# Altium PCB Incubator_HUZZAH32.PcbDoc
Units mm, origin at the board's own origin, x right, y up, seen from the top; angles counter-clockwise.
Board outline 140 x 28.1 mm, 2 copper layers (Top Layer, Bottom Layer); 24 components, 26 nets, 107 pads, 45 vias.
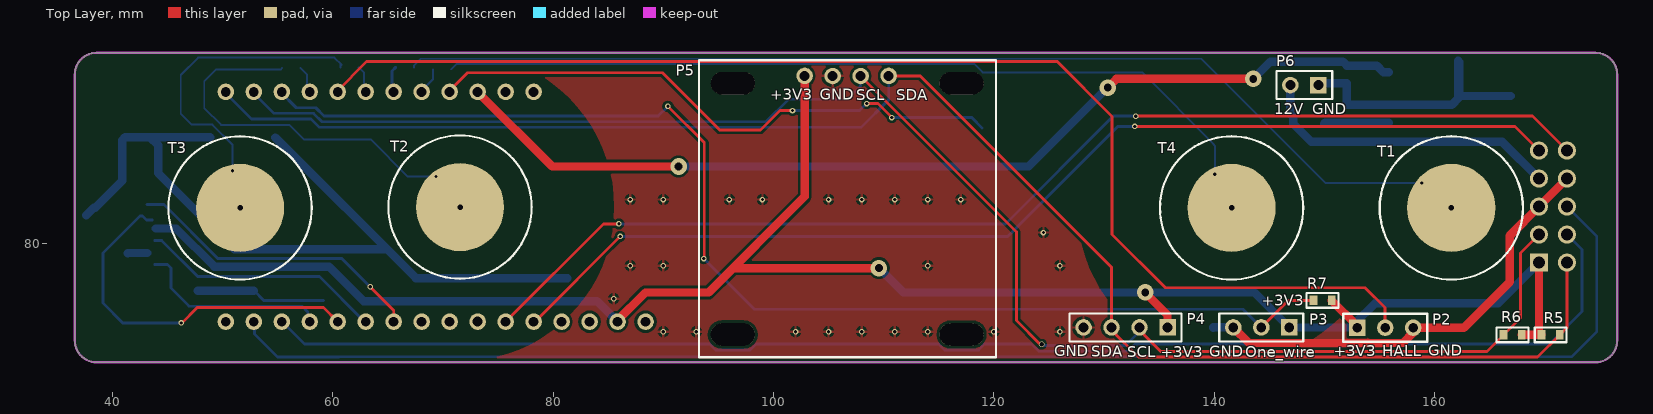
[diagram p0: Top Layer view]
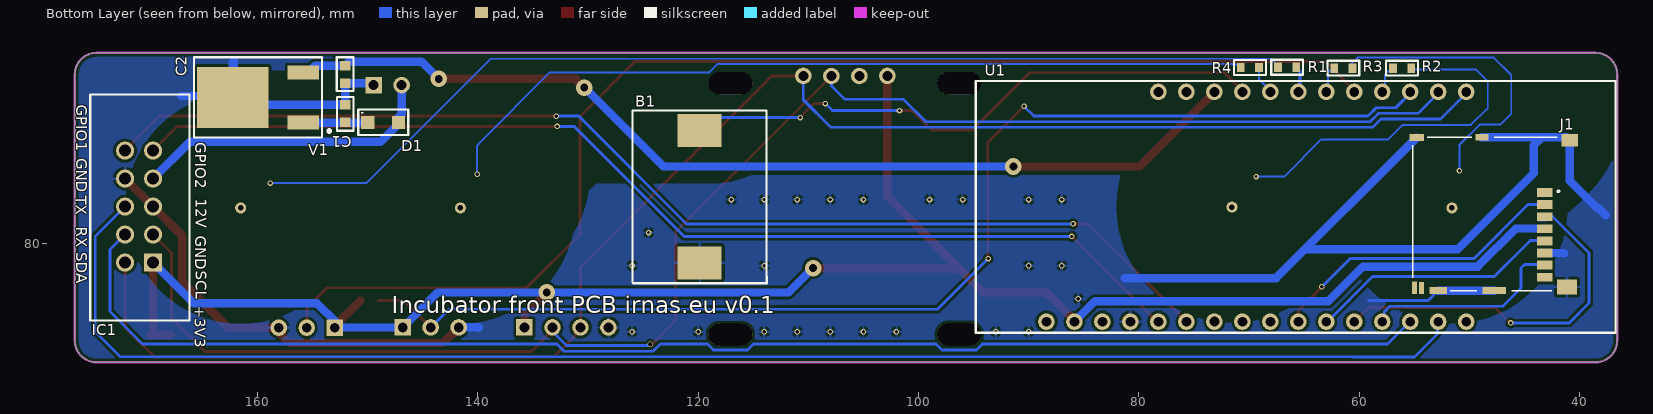
[diagram p1: Bottom Layer view, seen from below]

## Layer stack, top to bottom
Top Solder: solder mask 0.0102, Solder Resist, Dk 3.5
Top Layer: signal copper 0.0356
Dielectric 1: dielectric 0.32, FR-4, Dk 4.8
Bottom Layer: signal copper 0.0356
Bottom Solder: solder mask 0.0102, Solder Resist, Dk 3.5

## Board outline
38.582,69.221 cw(c38.582,71.221) 36.582,71.221 36.582,95.321 cw(c38.582,95.321) 38.582,97.321 174.582,97.321 cw(c174.582,95.321) 176.582,95.321 176.582,71.221 cw(c174.582,71.221) 174.582,69.221

## Design rules (kind name [scope] priority, off if disabled: settings)
Clearance Clearance_2 [InNamedPolygon('Bottom_layer_GND') vs InNetClass('Buttons')] p1: gap=10 ignorepadtopadclearanceinfootprint=FALSE
Clearance Clearance_1 [InNamedPolygon('Top Layer-GND') vs InNetClass('Buttons')] p2: gap=10 ignorepadtopadclearanceinfootprint=FALSE
Clearance [All] p3: gap=0.254 ignorepadtopadclearanceinfootprint=FALSE
HoleSize [All] p1: absolutevalues=TRUE maxlimit=5 minlimit=0.025 maxpercent=80.000 minpercent=20.000
MinimumAnnularRing [All] p1: minimumring=0.05
MinimumSolderMaskSliver [All] p1: minsoldermaskwidth=0.001
PlaneClearance [InNet('NetR1_1')] p1: clearance=0.762
PolygonConnect [All] p1: connectstyle=Relief reliefconductorwidth=0.254 reliefentries=4 polygonreliefangle="90 Angle" airgapwidth=0.254
RoutingVias RoutingVias_3 [InNet('GND')] p1: holewidth=0.711 width=1.27 viastyle="Through Hole" minholewidth=0.711 minwidth=1.27 maxholewidth=0.711 maxwidth=1.27
RoutingVias RoutingVias_2 [InNet('+5V')] p2: holewidth=0.711 width=1.27 viastyle="Through Hole" minholewidth=0.711 minwidth=1.27 maxholewidth=0.711 maxwidth=1.27
RoutingVias RoutingVias_1 [InNet('+3V3')] p3: holewidth=0.711 width=1.27 viastyle="Through Hole" minholewidth=0.711 minwidth=1.27 maxholewidth=0.711 maxwidth=1.27
RoutingVias [All] p4: holewidth=0.4 width=0.5 viastyle="Through Hole" minholewidth=0.3 minwidth=0.5 maxholewidth=0.3 maxwidth=0.5
SilkToSilkClearance [All] p1: silktosilkclearance=0.1
SilkToSolderMaskClearance [IsPad] p1: minsilkscreentomaskgap=0.1 clearancetoexposedcopper=TRUE
SolderMaskExpansion [All] p1: expansion=0.102
Width Width_2 [All] p1: maxlimit=0.762 minlimit=0.178 preferedwidth=0.254
Width Width_1 [InNet('+3V3')] p2: maxlimit=0.762 minlimit=0.254 preferedwidth=0.762
Width [InNetClass('Buttons')] p3: maxlimit=0.762 minlimit=0.178 preferedwidth=0.254
25 further rules are at their usual default settings.

## Classes and differential pairs
net class Buttons: Button1 Button2 Button3 Button4 NetR1_1 NetR2_1 NetR3_1 NetR4_1

## Components (designator, comment, footprint, x,y, rotation, side; value= is the part's Value field where it differs from the comment)
B1 "Buzzer" BUZZER 113.767,90.449 r270 bottom
C1 "0.33uF" CAP0603 152.019,91.796 r270 bottom
C2 "0.1uF" CAP0603 152.044,95.352 r90 bottom
D1 "Diode" SODFL350X110-2N 148.59,90.983 r180 bottom
IC1 "IDC10" IDC10 170.84,83.591 r90 bottom
J1 "Micro_SD" TE_2201778-1 47.93,82.677 r90 bottom
P2 "HALL_s" HDR1X3 152.984,72.365 r0 top
P3 "One_wire" HDR1X3 146.812,72.39 r180 top
P4 "I2C_connector" HDR1X4 135.763,72.39 r180 top
P5 "LCD_display" LCD_DISPLAY 93.218,96.647 r0 top
P6 "Power" HDR1X2 149.454,94.386 r180 top
R1 "510R" RES0603 67.996,95.326 r180 bottom
R2 "510R" RES0603 54.661,96.596 r0 bottom
R3 "510R" RES0603 59.995,96.596 r0 bottom
R4 "510R" RES0603 71.374,95.301 r180 bottom
R5 "4K7" RES0603 169.088,71.044 r0 top
R6 "4K7" RES0603 168.529,72.39 r180 top
R7 "4K7" RES0603 148.387,74.168 r0 top
T1 "Touch button" TOUCH_BUTTON 161.519,83.236 r90 top
T2 "Touch button" TOUCH_BUTTON 71.552,83.312 r90 top
T3 "Touch button" TOUCH_BUTTON 51.587,83.236 r90 top
T4 "Touch button" TOUCH_BUTTON 141.58,83.236 r90 top
U1 "ESP32" ESP32 94.742,71.907 r90 bottom
V1 "Voltage regulator" DPAK248P950X240-3N 162.23,93.269 r0 bottom

## Footprints (in the part's own frame and the unit in brackets; to place one, negate y for a bottom-side part, rotate by r counter-clockwise, add the part's x,y. Pads: shape width x height; smd on the part's side, far side on the other; paste and mask are expansions set on the pad)
BUZZER [mm]
  rect 3x4 smd: 1(0.2,-6.1) 2(12.2,-6.1)
  silkscreen extent -1.64,-12.19 14.05,-0.01, body extent -0.33,-12.22 12.73,-0.05, height 3
CAP0603 [mm] "Chip Capacitor, 2-Leads, Body 1.60x0.80mm, IPC Medium Density"
  rect 0.85x0.95 smd: 1(-0.8,0) 2(0.8,0)
  silkscreen extent -1.5,-0.76 1.56,0.75, body extent -0.8,-0.4 0.8,0.4, height 0.6
DPAK248P950X240-3N [mm] "D-PAK, 3-Pads, Body 6.25x6.76mm (max), IPC Medium Density"
  rect 2.85x1.25 smd: 1(-6.39,2.29) 3(-6.39,-2.27)
  rect 6.5x5.55 smd: 2(0,0)
  silkscreen extent -8.88,-3.65 3.54,3.64, body extent -4.4,-3.4 1.9,3.4, height 2.4
ESP32 [mm]
  round 1.5 hole 0.9: 1(1,-6.35) 2(1,-8.89) 3(1,-11.43) 4(1,-13.97) 5(1,-16.51) 6(1,-19.05) 7(1.01,-21.59) 8(1,-24.13) 9(1,-26.67) 10(1,-29.21) 11(1,-31.75) 12(1,-34.29) 13(1,-36.83) 14(1,-39.37) 15(1,-41.91) 16(1,-44.45) 17(21.86,-44.45) 18(21.86,-41.91) 19(21.86,-39.37) 20(21.86,-36.83) 21(21.86,-34.29) 22(21.86,-31.75) 23(21.86,-29.21) 24(21.86,-26.67) 25(21.86,-24.13) 26(21.86,-21.59) 27(21.86,-19.05) 28(21.86,-16.51)
  silkscreen extent 0,-57.99 22.85,0.06
HDR1X2 [mm] "Connector; Header; 2 Position"
  rect 1.5x1.5 hole 0.9: 1(0,0)
  round 1.5 hole 0.9: 2(2.54,0)
  silkscreen extent -1.27,-1.27 3.81,1.27
HDR1X3 [mm] "Connector; Header; 3 Position"
  rect 1.5x1.5 hole 0.9: 1(0,0)
  round 1.5 hole 0.9: 2(2.54,0) 3(5.08,0)
  silkscreen extent -1.27,-1.27 6.35,1.27
HDR1X4 [mm] "Connector; Header; 4 Position"
  rect 1.5x1.5 hole 0.9: 1(0,0)
  round 1.5 hole 0.9: 2(2.54,0) 3(5.08,0) 4(7.62,0)
  silkscreen extent -1.27,-1.27 8.89,1.27
IDC10 [mm]
  rect 1.65x1.65 / inner round 1.65 / far side rect 1.65x1.65 hole 1.1: 1(-5.313,-1.367)
  round 1.65 hole 1.1: 2(-5.313,1.173) 3(-2.773,-1.367) 4(-2.773,1.173) 5(-0.233,-1.367) 6(-0.233,1.173) 7(2.307,-1.367) 8(2.307,1.173) 9(4.847,-1.367) 10(4.847,1.173)
  silkscreen extent -10.56,-4.68 9.95,4.33, body extent -10.45,-4.51 9.91,4.66, height 9.43
LCD_DISPLAY [mm]
  round 1.5 hole 0.9: 1(9.61,-1.43)
  round 1.501 hole 0.9: 2(12.15,-1.44) 3(14.69,-1.44) 4(17.24,-1.43)
  oval 4x2 hole 2.032 slot 3.988 at 0 deg unplated: ""(3.09,-24.9) ""(3.1,-2.1) ""(23.85,-2.1)
  oval 4x2 hole 2 slot 3.988 at 0 deg unplated: ""(23.85,-24.9)
  silkscreen extent 0.01,-26.96 26.97,0
RES0603 [mm] "Chip Resistor, 2-Leads, Body 1.60x0.80mm, IPC Medium Density"
  rect 0.7x0.85 smd: 1(0.625,0.675) 2(2.275,0.675)
  silkscreen extent 0,0 2.9,1.35, body extent 0.65,0.28 2.25,1.07, height 0.6
SODFL350X110-2N [mm] "SODFL, 2-Leads, Body 1.90x3.50mm, IPC Medium Density"
  rect 1.2x1.2 smd: 1(-1.4,0) 2(1.4,0)
  silkscreen extent -2.26,-1.14 2.27,1.19, body extent -1.4,-0.95 1.4,0.95, height 1.1
TE_2201778-1 [mm]
  rect 0.8x1.4 smd: 1(1.965,-4.75) 2(0.865,-4.75) 3(-0.235,-4.75) 4(-1.335,-4.75) 5(-2.435,-4.75) 6(-3.535,-4.75) 7(-4.635,-4.75) 8(-5.735,-4.75)
  rect 1.15x0.45 smd: 9(-6.7,7.075)
  rect 1.1x0.45 smd: 10(-6.725,6.415)
  rect 1.35x1.8 smd: 11(-6.625,-6.8)
  rect 0.65x2.14 smd: 12(-6.95,-0.17)
  rect 0.65x1.6 smd: 13(-6.95,4.91)
  rect 0.65x1.3 smd: 14(6.95,6.85)
  rect 0.6x1.15 smd: 15(6.975,0.925)
  rect 1.16x1.5 smd: 16(6.695,-7.05)
  silkscreen extent -6.98,-6.11 6.98,7.2, body extent -7.02,-8.91 7.01,7.29, height 1.75
TOUCH_BUTTON [mm]
  round 8 smd: 1(0,0)
  round 1 hole 0.5: 1(0,0)
  silkscreen extent -6.5,-6.5 6.5,6.5

## Part data
B1: "MULTICOMP         MCABT-458-RC            SOUNDER, 75DB, 1-25V, SMD", Current Rating=1mA, Manufacturer=Multicomp, Manufacturer Part Number=MCABT-458-RC, Resonant Frequency=4kHz, Supply Voltage Max=25V, Supply Voltage Min=1V, ComponentLink1Description=http://www.farnell.com/datasheets/1860703.pdf, ComponentLink1URL=http://www.farnell.com/datasheets/1860703.pdf, Pricing 1="1=1.84, 3=1.67, 5=1.53, 10=1.44, 20=1.18, 50=1.16, 250=1.13 (EUR)", Product Range=-, Sound Level SPL=75dB, Stock 1=2929, Supplier 1=Farnell, SVHC="No SVHC (15-Jun-2015)", Tones=Single, Transducer Function=Sounder, Transducer Mounting=SMD
C1: "0.33µF ±10% 50V X7R Ceramic Capacitor -55°C ~ 125°C Surface Mount, MLCC 0603 (1608 Metric) 0.063\" L x 0.031\" W (1.60mm x 0.80mm)", Capacitance=0.33µF, Manufacturer=TDK, Manufacturer Part Number=C1608X7R1H334K080AC, Operating Temperature="-55°C ~ 125°C", Package / Case="0603 (1608 Metric)", PCN Part Number="MLCC Part Number Change 30/Nov/2012", Standard Package=1, Supplier Part Number 1=2522009, Temperature Coefficient=X7R, Tolerance=±10%, Voltage - Rated=50V, Applications="General Purpose", Catalog Drawings="C SERIES_0603_0.95", Category=Capacitors, ComponentLink1Description=https://datasheet.ciiva.com/24216/c1608x7r1h334k080ac-264671-24216479.pdf, ComponentLink1URL=https://datasheet.ciiva.com/24216/c1608x7r1h334k080ac-264671-24216479.pdf, ComponentLink2Description=https://datasheet.ciiva.com/22718/1796654-22718021.pdf, ComponentLink2URL=https://datasheet.ciiva.com/22718/1796654-22718021.pdf, ComponentLink3Description=https://datasheet.ciiva.com/6290/tdkmlcccaprange-6290791.pdf, ComponentLink3URL=https://datasheet.ciiva.com/6290/tdkmlcccaprange-6290791.pdf, ComponentLink4Description=https://datasheet.ciiva.com/16427/general-b11-16427753.pdf, ComponentLink4URL=https://datasheet.ciiva.com/16427/general-b11-16427753.pdf, ComponentLink5Description=https://datasheet.ciiva.com/23803/1735394-23803004.pdf, ComponentLink5URL=https://datasheet.ciiva.com/23803/1735394-23803004.pdf, ComponentLink6Description=https://datasheet.ciiva.com/28451/1796654-28451356.pdf, ComponentLink6URL=https://datasheet.ciiva.com/28451/1796654-28451356.pdf, ComponentLink7Description=https://datasheet.ciiva.com/6290/tdkmlcccaprange-6290782.pdf, ComponentLink7URL=https://datasheet.ciiva.com/6290/tdkmlcccaprange-6290782.pdf, Design Resources="20 W Non-Isolated Buck LED Driver Using PL LNK460KG", EDA / CAD Models="Download from Accelerated Designs", Family="Ceramic Capacitors", Mounting Type="Surface Mount, MLCC", Online Catalog="C Series, General Purpose", Other Names=445-5950-6, Packaging=Digi-Reel®, Pricing 1="4000=0.0692 (EUR)", Product Training Modules="C Series General Applications SEAT, CCV, and TVCL Design Tools Guide to Replacing an Electrolytic Capacitor with an MLCC", RoHS Information="RoHS Certificate-MLCC", Series=C, Size / Dimension="0.063\" L x 0.031\" W (1.60mm x 0.80mm)", Stock 1=268000, Supplier 1=Farnell, Thickness (Max)="0.037\" (0.95mm)"
C2: "CAP CER 0.1UF 50V X7R 0603", Capacitance="0.1 uF", Capacitance - nF="100 nF", Capacitance - pF="100000 pF", Case Code - in=0603, Case Code - mm=1608, Case Height="0.035 mm", Case Length="1.6 mm", Case Width="0.81 mm", Dielectric=X7R, Manufacturer="Kyocera AVX", Manufacturer Part Number=06035C104K4Z2A, Maximum Operating Temperature="+ 125 C", Minimum Operating Temperature="- 55 C", Operating Temperature Range="- 55 C to + 125 C", Package / Case="0603 (1608 metric)", Supplier Part Number 1=1833843RL, Temperature Coefficient / Code="+/- 15 %", Tolerance="10 %", Voltage Rating="50 V", Brand=AVX, ComponentLink1Description=https://datasheet.ciiva.com/17495/flexiterm-17495077.pdf, ComponentLink1URL=https://datasheet.ciiva.com/17495/flexiterm-17495077.pdf, ComponentLink2Description=https://datasheet.ciiva.com/153/flexiterm-153369.pdf, ComponentLink2URL=https://datasheet.ciiva.com/153/flexiterm-153369.pdf, ComponentLink3Description=https://datasheet.ciiva.com/153/flexiterm-153370.pdf, ComponentLink3URL=https://datasheet.ciiva.com/153/flexiterm-153370.pdf, ComponentLink4Description=https://datasheet.ciiva.com/15212/getdatasheetpartid-494917-15212298.pdf, ComponentLink4URL=https://datasheet.ciiva.com/15212/getdatasheetpartid-494917-15212298.pdf, ComponentLink5Description=https://datasheet.ciiva.com/153/flexiterm-153371.pdf, ComponentLink5URL=https://datasheet.ciiva.com/153/flexiterm-153371.pdf, ComponentLink6Description=https://datasheet.ciiva.com/22707/1679506-22707787.pdf, ComponentLink6URL=https://datasheet.ciiva.com/22707/1679506-22707787.pdf, ComponentLink7Description=https://datasheet.ciiva.com/1457/1679506-1457868.pdf, ComponentLink7URL=https://datasheet.ciiva.com/1457/1679506-1457868.pdf, Dimensions="0.81 mm W x 1.6 mm L x 0.035 mm H", Dissipation Factor DF=2.5, Factory Pack Quantity=4000, Packaging=Reel, Product="Automotive MLCCs", Product Category="Multilayer Ceramic Capacitors MLCC - SMD/SMT", RoHS=Details, Series="0603 C", Stock 1=0, Supplier 1=Farnell, Termination="Flexible (Soft)", Termination Style=SMD/SMT, Tradename=FLEXITERM, Type="Automotive MLCCs X7R Dielectric, Flexiterm", Voltage Rating DC="50 V"
D1: library part "20V,1A, SOD-123", "NXP         PMEG2010ER             Schottky Rectifier, Single, 20 V, 1 A, SOD-123W, 2 Pins, 340 mV", Manufacturer="NXP Semiconductors", Manufacturer Part Number=PMEG2010ER, Maximum Continuous Forward Current=1A, Maximum Operating Temperature="+150 °C", Minimum Operating Temperature="-55 °C", Package Type=SOD-123, Peak Forward Voltage=340mV, Peak Reverse Current=1mA, Peak Reverse Repetitive Voltage=20V, Supplier Part Number 1=1907681, ComponentLink1Description=https://datasheet.ciiva.com/5727/1760771-5727088.pdf, ComponentLink1URL=https://datasheet.ciiva.com/5727/1760771-5727088.pdf, ComponentLink2Description=https://datasheet.ciiva.com/22696/1383341-22696483.pdf, ComponentLink2URL=https://datasheet.ciiva.com/22696/1383341-22696483.pdf, ComponentLink3Description=https://datasheet.ciiva.com/7965/1383341-7965062.pdf, ComponentLink3URL=https://datasheet.ciiva.com/7965/1383341-7965062.pdf, Dimensions="2.8 x 1.9 x 1.1mm", Diode Configuration=Single, Diode Type=Schottky, Height=1.1mm, Length=2.8mm, Mounting Type="Surface Mount", Number of Elements per Chip=1, Pin Count=2, Pricing 1="5=0.314, 25=0.196, 100=0.147, 250=0.141, 500=0.0849, 1000=0.075, 5000=0.0735 (EUR)", Stock 1=5091, Supplier 1=Farnell, Width=1.9mm
IC1: "BOX HEADER 2.54MM MALE STR 10POS", Current Rating="3 A", Flammability Rating="UL 94 V-0", Insulation Resistance="1000 MOhms", Manufacturer="Wurth Electronics", Manufacturer Part Number=61201021621, Operating Temperature Range="- 40 C to + 125 C", Supplier Part Number 1=1642019, Voltage Rating="250 V", Application=Wire-to-Board, Brand="Wurth Electronics", ComponentLink1Description=https://datasheet.ciiva.com/731/6120xx21621-731344.pdf, ComponentLink1URL=https://datasheet.ciiva.com/731/6120xx21621-731344.pdf, ComponentLink2Description=https://datasheet.ciiva.com/15395/6120xx21621-265834-15395106.pdf, ComponentLink2URL=https://datasheet.ciiva.com/15395/6120xx21621-265834-15395106.pdf, ComponentLink3Description=https://datasheet.ciiva.com/7648/76595-7648121.pdf, ComponentLink3URL=https://datasheet.ciiva.com/7648/76595-7648121.pdf, Contact Gender="Pin (Male)", Contact Material="Copper Alloy", Contact Plating=Gold, Housing Material="Polybutylene Terephthalate (PBT)", Mounting Angle=Horizontal, Mounting Style="Through Hole", Number of Positions="10 Position", Number of Rows="2 Row", Packaging=Tray, Pitch="2.54 mm", Product=Headers, Product Category="Headers & Wire Housings", RoHS=True, Series=WR-BHD, Stock 1=0, Supplier 1=Farnell, Termination Style=Solder, Type=Shrouded
J1: library part 2201778-1, "MICRO SD PUSH PUSH LOW PROFILE TYPE", Package=None, Availability=Good, Centerline_Pitch="1.1 mm[.04 in]", EU_RoHS_Compliance=Compliant, Link=http://www.te.com/usa-en/product-2201778-1.html, MF="TE Connectivity", MP=2201778-1, Number_of_Positions=8, Price="1.95 USD", Product_Type="Removable Memory Products", SnapEDA_Link=https://www.snapeda.com/parts/2201778-1/TE%20Connectivity%20AMP%20Connectors/view-part/?ref=snap
P2 P3: library part "Header 3", "Header, 3-Pin", LatestRevisionDate=17-Jul-2002, LatestRevisionNote="Re-released for DXP Platform.", Publisher="Altium Limited"
P4 P5: library part "Header 4", "Header, 4-Pin", LatestRevisionDate=17-Jul-2002, LatestRevisionNote="Re-released for DXP Platform.", Publisher="Altium Limited"
P6: library part "Header 2", "Header, 2-Pin", LatestRevisionDate=17-Jul-2002, LatestRevisionNote="Re-released for DXP Platform.", Publisher="Altium Limited"
R1 R2 R3 R4: "Res Thick Film 0603 510 Ohm 1% 0.1W(1/10W) ±100ppm/C Molded SMD Automotive Punched T/R", Manufacturer=Panasonic, Manufacturer Part Number=ERJ-3EKF5100V, Power Rating=100mW, Resistance=510ohm, Resistance Tolerance="± 1%", Resistor Case Style="0603 ^1608 Metric]", Resistor Element Type="Thick Film", Supplier Part Number 1=2059312, Temperature Coefficient="± 100ppm/°C", Voltage Rating=75V, ComponentLink1Description=https://datasheet.ciiva.com/9181/aoa0000ce2-9181526.pdf, ComponentLink1URL=https://datasheet.ciiva.com/9181/aoa0000ce2-9181526.pdf, ComponentLink2Description=https://datasheet.ciiva.com/28565/1678782-28565126.pdf, ComponentLink2URL=https://datasheet.ciiva.com/28565/1678782-28565126.pdf, ComponentLink3Description=https://datasheet.ciiva.com/16787/70260748-16787975.pdf, ComponentLink3URL=https://datasheet.ciiva.com/16787/70260748-16787975.pdf, ComponentLink4Description=https://datasheet.ciiva.com/46436/426256-46436792.pdf, ComponentLink4URL=https://datasheet.ciiva.com/46436/426256-46436792.pdf, ComponentLink5Description=https://datasheet.ciiva.com/24027/aoa0000ce2-24027562.pdf, ComponentLink5URL=https://datasheet.ciiva.com/24027/aoa0000ce2-24027562.pdf, ComponentLink6Description=https://datasheet.ciiva.com/28676/1678782-28676970.pdf, ComponentLink6URL=https://datasheet.ciiva.com/28676/1678782-28676970.pdf, ComponentLink7Description=https://datasheet.ciiva.com/16514/aoa0000ce2-16514091.pdf, ComponentLink7URL=https://datasheet.ciiva.com/16514/aoa0000ce2-16514091.pdf, ComponentLink8Description=https://datasheet.ciiva.com/5868/426256-5868140.pdf, ComponentLink8URL=https://datasheet.ciiva.com/5868/426256-5868140.pdf, ComponentLink9Description=https://datasheet.ciiva.com/9181/aoa0000ce2-9181437.pdf, ComponentLink9URL=https://datasheet.ciiva.com/9181/aoa0000ce2-9181437.pdf, ComponentLink10Description=https://datasheet.ciiva.com/16775/70260748-16775519.pdf, ComponentLink10URL=https://datasheet.ciiva.com/16775/70260748-16775519.pdf, ComponentLink11Description=https://datasheet.ciiva.com/30146/aoa0000ce2-30146815.pdf, ComponentLink11URL=https://datasheet.ciiva.com/30146/aoa0000ce2-30146815.pdf, Packaging="Full Reel", Pricing 1="10=0.0416, 100=0.0243, 500=0.0183, 1000=0.0164 (EUR)", Product Range="PANASONIC - ERJ Series Thick Film Chip Resistors", Stock 1=28364, Supplier 1=Farnell, SVHC="To Be Advised"
R5 R6 R7: "Res Thick Film 0603 4.7K Ohm 1% 0.1W(1/10W) ±100ppm/C Molded SMD Automotive T/R", Case Code - in=0603, Case Code - mm=1608, Manufacturer=Panasonic, Manufacturer Part Number=ERJ-3EKF4701V, Operating Temperature Range="- 55 C to + 155 C", Package / Case="0603 (1608 metric)", Power Rating="100 mW", Resistance="4.7 kOhms", Supplier Part Number 1=2397726, Temperature Coefficient="100 PPM / C", Tolerance="1 %", Voltage Rating="75 V", Brand=Panasonic, ComponentLink1Description=https://datasheet.ciiva.com/16449/aoa0000ce2-16449479.pdf, ComponentLink1URL=https://datasheet.ciiva.com/16449/aoa0000ce2-16449479.pdf, ComponentLink2Description=https://datasheet.ciiva.com/16511/aoa0000ce2-16511783.pdf, ComponentLink2URL=https://datasheet.ciiva.com/16511/aoa0000ce2-16511783.pdf, ComponentLink3Description=https://datasheet.ciiva.com/7830/426256-7830985.pdf, ComponentLink3URL=https://datasheet.ciiva.com/7830/426256-7830985.pdf, ComponentLink4Description=https://datasheet.ciiva.com/9195/aoa0000ce2-9195740.pdf, ComponentLink4URL=https://datasheet.ciiva.com/9195/aoa0000ce2-9195740.pdf, ComponentLink5Description=https://datasheet.ciiva.com/46372/1678782-46372716.pdf, ComponentLink5URL=https://datasheet.ciiva.com/46372/1678782-46372716.pdf, ComponentLink6Description=https://datasheet.ciiva.com/16758/70260748-16758189.pdf, ComponentLink6URL=https://datasheet.ciiva.com/16758/70260748-16758189.pdf, ComponentLink7Description=https://datasheet.ciiva.com/24160/aoa0000ce2-24160445.pdf, ComponentLink7URL=https://datasheet.ciiva.com/24160/aoa0000ce2-24160445.pdf, ComponentLink8Description=https://datasheet.ciiva.com/46372/1678782-46372717.pdf, ComponentLink8URL=https://datasheet.ciiva.com/46372/1678782-46372717.pdf, ComponentLink9Description=https://datasheet.ciiva.com/17213/aoa0000ce2-17213182.pdf, ComponentLink9URL=https://datasheet.ciiva.com/17213/aoa0000ce2-17213182.pdf, ComponentLink10Description=https://datasheet.ciiva.com/7830/aoa0000ce2-7830735.pdf, ComponentLink10URL=https://datasheet.ciiva.com/7830/aoa0000ce2-7830735.pdf, Factory Pack Quantity=5000, Height="0.45 mm", Length="1.6 mm", Packaging=Reel, Pricing 1="5000=0.0123, 25000=0.0099 (EUR)", Product="Thick Film Resistors SMD", Product Category="Thick Film Resistors", Qualification=AEC-Q200, RoHS=True, Series=ERJ, Stock 1=240000, Supplier 1=Farnell, Termination Style=SMD/SMT, Type="Precision Thick Film Resistors SMD", Unit Weight="0.000071 oz", Width="0.8 mm"
U1: library part 3405, "Dip connectro for MCU", Manufacturer="Adafruit Industries", Supplier Part Number 1=1528-2181-ND, ComponentLink1Description=https://espressif.com/sites/default/files/documentation/esp32_datasheet_en.pdf, ComponentLink1URL=https://espressif.com/sites/default/files/documentation/esp32_datasheet_en.pdf, Manufacturer Part Number=3405, Pricing 1="1=19.95 (USD)", Stock 1=276, Supplier 1=Digi-Key
V1: library part 5-20V, "FAIRCHILD SEMICONDUCTOR         KA7805ERTF             Linear Voltage Regulator, 7805, Fixed, 10V To 35V In, 5V And 1A Out, TO-252-3", Dropout Voltage Measurement Current="1 A", Manufacturer="ON Semiconductor / Fairchild", Manufacturer Part Number=KA7805ERTF, Maximum Input Voltage="25 V", Maximum Operating Temperature="+125 °C", Maximum Output Current=1A, Minimum Input Voltage="7 V", Minimum Operating Temperature="0 °C", Output Voltage="5 V", Package Type=DPAK, Quiescent Current=8mA, Supplier Part Number 1=2102585RL, Typical Dropout Voltage @ Current="2 V @ 1 A", ComponentLink1Description=https://datasheet.ciiva.com/26180/ka7824e-26180282.pdf, ComponentLink1URL=https://datasheet.ciiva.com/26180/ka7824e-26180282.pdf, ComponentLink2Description=https://datasheet.ciiva.com/1511/1747520-1511515.pdf, ComponentLink2URL=https://datasheet.ciiva.com/1511/1747520-1511515.pdf, ComponentLink3Description=https://datasheet.ciiva.com/3224/ka7824e-3224876.pdf, ComponentLink3URL=https://datasheet.ciiva.com/3224/ka7824e-3224876.pdf, ComponentLink4Description=https://datasheet.ciiva.com/7658/1747520-7658876.pdf, ComponentLink4URL=https://datasheet.ciiva.com/7658/1747520-7658876.pdf, ComponentLink5Description=https://datasheet.ciiva.com/6592/ka7805e-6592445.pdf, ComponentLink5URL=https://datasheet.ciiva.com/6592/ka7805e-6592445.pdf, ComponentLink6Description=https://datasheet.ciiva.com/6592/ka7805e-6592446.pdf, ComponentLink6URL=https://datasheet.ciiva.com/6592/ka7805e-6592446.pdf, ComponentLink7Description=https://datasheet.ciiva.com/6592/ka7805e-6592463.pdf, ComponentLink7URL=https://datasheet.ciiva.com/6592/ka7805e-6592463.pdf, ComponentLink8Description=https://datasheet.ciiva.com/48694/001252964-da-01-en-ic-reg-ldo-5v-1a-ka7805ertf-to-252-3-fsc-48694758.pdf, ComponentLink8URL=https://datasheet.ciiva.com/48694/001252964-da-01-en-ic-reg-ldo-5v-1a-ka7805ertf-to-252-3-fsc-48694758.pdf, Dimensions="6.73 x 6.22 x 2.38mm", Height=2.38mm, Length=6.73mm, Line Regulation="100 mV", Load Regulation="100 mV", Mounting Type="Surface Mount", Number of Outputs=1, Output Type=Fixed, Pin Count=3, Polarity=Positive, Regulator Function=Linear, Series=KA78xx, Stock 1=0, Supplier 1=Farnell, Width=6.22mm

## Via types
v1: diameter 0.5, hole 0.3, Top Layer to Bottom Layer, 39 vias
v2: diameter 1.5, hole 0.7, Top Layer to Bottom Layer, 5 vias
v3: diameter 0.5, hole 0.4, Top Layer to Bottom Layer, 1 vias

## Nets (pads, with @x,y where several pads share a name; then routed paths per layer and width w, separated by ;. In a path a pad name is that pad's centre, name@x,y a point inside that pad or via, vN(x,y) a via of type N, cw(c..) or ccw(c..) an arc to the next point about the centre after c; other vN are vias at no path point)
12V: D1.2 IC1.7 P6.2 | length 27.8
  Bottom Layer w0.762: P6.2@146.914,94.234 146.914,91.77 147.165,91.519 147.165,90.881 148.816,89.23 166.142,89.23 IC1.7
+3V3: IC1.1 J1.4 P2.1 P3.1 P4.1 P5.1 R5.1 R6.1 R7.2 U1.2 | length 172
  Top Layer w0.75: v2(133.731,75.565) 135.763,73.533 P4.1 ; R7.2 152.984,72.521 P2.1 ; R6.1 169.709,71.715 R5.1 169.473,71.958 IC1.1
  Top Layer w0.762: U1.2@85.725,72.907 88.383,75.565 94.123,75.565 102.828,84.27 P5.1 ; 96.482,77.813 96.52,77.775 v2(109.576,77.775)
  Bottom Layer w0.75: 43.942,81.367 45.785,81.367 49.251,77.902 59.665,77.902 62.789,74.778 83.982,74.778 U1.2 ; v2(109.576,77.775) 111.785,75.565 v2(133.731,75.565) 143.637,75.565 P3.1 152.781,72.39 152.781,72.771 154.584,74.574 165.769,74.574 IC1.1
+5V: C2.2 U1.26 V1.3 | length 89.8
  Top Layer w0.762: U1.26 79.924,86.995 v2(91.389,86.995) ; v2(130.327,94.158) 131.115,94.945 v2(143.535,94.945)
  Bottom Layer w0.762: v2(91.389,86.995) 123.165,86.995 v2(130.327,94.158) ; v2(143.535,94.945) 145.11,96.52 151.676,96.52 C2.2 154.75,96.152 155.362,95.539 V1.3
Button1: R1.2 U1.23 | length 2.4
  Bottom Layer w0.254: U1.23@65.405,93.767 65.391,93.782 65.391,95.671 R1.2
Button2: R2.2 U1.20 | length 2.5
  Bottom Layer w0.178: R2.2@57.063,95.947 57.647,95.362 57.647,93.905 U1.20@57.785,93.767
Button3: R3.2 U1.22 | length 2.4
  Bottom Layer w0.178: R3.2@62.346,95.997 62.854,95.489 62.854,93.778 U1.22@62.865,93.767
Button4: R4.2 U1.24 | length 2.5
  Bottom Layer w0.178: U1.24@67.945,93.767 69.099,94.921 R4.2@69.099,95.823
CD/DAT3: J1.2 U1.10 | length 27.4
  Top Layer w0.254: v1(63.398,76.073) 65.532,73.939 U1.10
  Bottom Layer w0.254: J1.2@43.154,83.542 44.68,83.542 49.564,78.658 60.814,78.658 v1(63.398,76.073)
CMD: J1.3 U1.12 | length 33.7
  Top Layer w0.254: v1(46.253,72.796) 46.304,72.796 47.701,74.193 59.166,74.193 U1.12
  Bottom Layer w0.254: J1.3@43.623,82.148 43.084,82.148 42.733,82.499 42.494,82.499 39.141,79.146 39.141,74.6 40.945,72.796 v1(46.253,72.796)
DAT0: J1.7 U1.13 | length 17.5
  Bottom Layer w0.254: J1.7@43.84,78.093 45.008,78.093 45.314,77.787 45.314,75.971 46.965,74.32 57.201,74.32 57.734,73.787 U1.13@57.734,72.984
GND: B1.2 C1.1 C2.1 IC1.5 IC1.8 J1.6 J1.11 J1.12 J1.13 J1.14 J1.15 J1.16 P2.3 P3.3 P4.4 P5.2 P6.1 U1.4 V1.2 | length 157.1
  Top Layer w0.762: P3.3 143.15,70.972 157.124,70.972 158.064,71.912 P2.3 162.662,72.365 166.827,76.53 166.827,80.712 IC1.5 IC1.8
  Bottom Layer w0.254: J1.13 53.738,74.828 59.157,74.828
  Bottom Layer w0.762: 37.643,82.575 38.329,83.261 38.456,83.261 40.88,85.685 J1.16 41.16,89.652 43.434,89.652 ; 41.402,79.121 41.423,79.142 J1.6 ; J1.12 J1.13 ; J1.15@48.88,89.627 J1.15 43.434,89.652 ; J1.14 67.546,76.86 81.305,76.86 ; 64.905,79.502 51.054,79.502 44.145,86.411 44.145,88.941 43.434,89.652 ; 139.903,72.365 139.929,72.39 P3.3 ; P6.1@149.454,94.234 149.771,94.552 C2.1 152.044,92.672 C1.1@152.095,92.621 ; C1.1 161.557,92.596 V1.2 ; 166.903,93.396 162.357,93.396 V1.2 ; 162.154,96.561 162.154,93.345 V1.2 ; 162.154,96.561 162.154,96.586 162.128,96.586 162.154,96.561 ; 162.154,96.561 162.23,96.485 V1.2
  other v1: 90,72 93,72 102,72 105,72 108,72 111,72 114,72 120,72 126,72 85.5,75 87,78 90,78 114,78 126,78 124.5,81 87,84 90,84 96,84 99,84 105,84 108,84 111,84 114,84 117,84
GPIO1: IC1.10 U1.6 | length 105.3
  Top Layer w0.254: U1.6 84.573,81.788 v1(85.979,81.788) ; v1(132.867,91.567) 168.885,91.567 IC1.10
  Bottom Layer w0.254: v1(85.979,81.788) 121.056,81.788 130.835,91.567 v1(132.867,91.567)
GPIO2: IC1.9 U1.5 | length 99.5
  Top Layer w0.254: U1.5 78.343,72.907 v1(86.081,80.645) ; v1(132.791,90.627) 167.285,90.627 IC1.9
  Bottom Layer w0.254: v1(86.081,80.645) 121.26,80.645 131.242,90.627 v1(132.791,90.627)
HALL: P2.2 U1.21 | length 113.4
  Top Layer w0.254: U1.21@60.325,93.767 63.078,96.52 125.755,96.52 130.734,91.542 130.734,80.823 135.564,75.993 153.699,75.993 155.499,74.193 P2.2@155.499,72.644
NetB1_1: B1.1 U1.25 | length 53.2
  Top Layer w0.254: U1.25@70.485,93.767 72.222,95.504 89.916,95.504 95.123,90.297 98.806,90.297 100.584,92.075 v1(101.727,92.075) ; v1(108.458,92.71) 109.474,92.71 v1(110.744,91.44)
  Bottom Layer w0.254: v1(101.727,92.075) 107.823,92.075 v1(108.458,92.71) ; v1(110.744,91.44) 117.99,91.44 B1.1@118.927,90.503
NetC1_2: C1.2 D1.1 V1.1 | length 5.9
  Bottom Layer w0.762: D1.1@149.965,90.881 150.062,90.979 V1.1
NetR1_1: R1.1 T1.1 | length 96.5
  Bottom Layer w0.178: R1.1 67.371,96.154 67.991,96.774 138.836,96.774 150.114,85.496 v1(158.826,85.496)
NetR2_1: R2.1 T2.1 | length 33.6
  Bottom Layer w0.178: R2.1@55.413,95.947 55.26,95.794 49.388,95.794 48.336,94.742 48.336,92.304 49.86,90.78 56.058,90.78 57.379,89.459 63.449,89.459 66.827,86.081 v1(69.367,86.081)
NetR3_1: R3.1 T3.1 | length 27.7
  Bottom Layer w0.178: v1(50.902,86.614) 50.902,88.976 49.073,90.805 47.193,90.805 46.203,91.796 46.203,95.301 47.78,96.878 60.145,96.878 60.796,96.228 60.696,96.328 R3.1@60.696,95.997
NetR4_1: R4.1 T4.1 | length 75.2
  Bottom Layer w0.178: R4.1@70.749,95.823 71.235,96.31 103.281,96.31 103.29,96.3 108.361,96.3 108.371,96.31 118.204,96.31 118.985,95.529 133.452,95.529 139.979,89.002 139.954,88.976 140.056,88.875 v1(140.056,86.284)
One_wire: P3.2 R7.1 U1.19 | length 110.6
  Top Layer w0.254: v1(90.424,92.456) 93.726,89.154 v1@93.726,78.638 ; P3.2 146.725,74.843 R7.1
  Bottom Layer w0.254: U1.19@55.245,93.767 56.683,92.329 58.46,92.329 59.222,91.567 89.535,91.567 v1(90.424,92.456) ; v1(93.675,78.638) 98.273,74.041 142.621,74.041 P3.2
RX: IC1.4 U1.14 | length 129
  Bottom Layer w0.254: U1.14@55.448,72.882 57.439,70.891 94.21,70.891 94.751,70.35 97.865,70.35 98.406,70.891 114.97,70.891 115.511,70.35 118.625,70.35 119.166,70.891 123.415,70.891 124.072,70.235 124.594,70.235 124.598,70.231 132.163,70.231 132.824,70.891 170.434,70.891 173.38,73.838 173.38,79.451 IC1.4
SCK: J1.5 U1.11 | length 22
  Bottom Layer w0.254: J1.5@43.84,80.293 44.472,80.293 47.752,77.013 58.785,77.013 U1.11@62.814,72.984
SCL: IC1.3 P4.2 P5.3 R6.2 U1.18 | length 144.8
  Top Layer w0.254: P5.3 122.047,81.068 122.047,73.025 124.206,70.866 v3(124.333,70.866) ; P4.2 133.223,72.136 135.149,70.21 164.749,70.21 R6.2 167.792,73.253 167.792,79.137 IC1.3
  Bottom Layer w0.178: P4.2@133.223,72.009 P4.2
  Bottom Layer w0.254: U1.18@52.705,93.767 54.651,91.821 58.249,91.821 59.011,91.059 99.327,91.059 101.359,93.091 106.68,93.091 107.908,94.319 P5.3 ; v3(124.333,70.866) 124.456,70.743 124.805,70.743 124.809,70.739 131.953,70.739 P4.2@133.223,72.009
SDA: IC1.2 P4.3 P5.4 R5.2 U1.17 | length 147.3
  Top Layer w0.254: P5.4 113.317,95.217 130.683,77.851 P4.3 130.683,72.136 133.117,69.702 169.346,69.702 R5.2 172.013,72.369 IC1.2
  Bottom Layer w0.254: U1.17@50.165,93.767 52.619,91.313 58.039,91.313 58.801,90.551 107.95,90.551 110.458,93.059 P5.4
TX: IC1.6 U1.15 | length 137.3
  Bottom Layer w0.254: U1.15@52.908,72.882 52.908,71.785 54.991,69.702 60.452,69.702 ; 60.579,69.702 60.452,69.702 ; IC1.6 174.727,80.645 174.727,72.034 172.415,69.723 60.473,69.723 60.452,69.702
pads on no net: J1.1 J1.8 J1.9 J1.10 P5. U1.1 U1.3 U1.7 U1.8 U1.9 U1.16 U1.27 U1.28

## Polygon pours and split planes (outlines as drawn)
GND on Top Layer "Top Layer-GND" (solid, remove dead copper, pour order 7): 38.582,69.221 cw(c38.582,71.221) 36.582,71.221 36.582,95.321 cw(c38.582,95.321) 38.582,97.321 174.582,97.321 cw(c174.582,95.321) 176.582,95.321 176.582,71.221 cw(c174.582,71.221) 174.582,69.221
GND on Bottom Layer "Bottom_layer_GND" (solid, remove dead copper, pour order 8): 38.582,69.221 cw(c38.582,71.221) 36.582,71.221 36.582,95.321 cw(c38.582,95.321) 38.582,97.321 174.582,97.321 cw(c174.582,95.321) 176.582,95.321 176.582,71.221 cw(c174.582,71.221) 174.582,69.221

## Keep-outs
Keep-Out Layer:
  lines w0.2: 36.582,71.221 ccw(c38.582,71.221) 38.582,69.221 174.582,69.221 ccw(c174.582,71.221) 176.582,71.221 ; 36.582,71.221 36.582,95.321 ; 36.582,71.221 36.582,71.221 ; 36.582,95.321 cw(c38.582,95.321) 38.582,97.321 174.582,97.321 cw(c174.582,95.321) 176.582,95.321 ; 36.582,95.321 36.582,95.321 ; 176.582,71.221 176.582,71.221 ; 176.582,71.221 176.582,95.321 ; 176.582,95.321 176.582,95.321

## Silkscreen, mask and mechanical layers (free items; w line width, h text height)
Top Overlay:
  text "+3V3" at 99.72,93.04 h1
  text "GND" at 104.191,93.04 h1
  text "SCL" at 107.493,93.015 h1
  text "SDA" at 111.15,93.015 h1
  text "12V" at 145.466,91.745 h1
  text "GND" at 148.895,91.745 h1
  text "+3V3" at 144.297,74.371 h1
  text "GND" at 159.436,69.799 h1
  text "GND" at 125.501,69.774 h1
  text "+3V3" at 150.851,69.774 h1
  text "HALL" at 155.245,69.774 h1
  text "SDA" at 128.854,69.748 h1
  text "GND" at 139.548,69.723 h1
  text "SCL" at 132.131,69.698 h1
  text "+3V3" at 135.153,69.698 h1
  text "One_wire" at 142.799,69.672 h1
Bottom Overlay:
  text "GPIO1" at 176.428,92.608 h1 r90
  text "GPIO2" at 165.633,89.205 h1 r90
  text "GND" at 176.428,87.732 h1 r90
  text "TX" at 176.505,84.328 h1 r90
  text "12V" at 165.583,84.049 h1 r90
  text "RX" at 176.428,81.534 h1 r90
  text "GND" at 165.633,80.696 h1 r90
  text "SDA" at 176.428,79.197 h1 r90
  text "SCL" at 165.608,77.521 h1 r90
  text "+3V3" at 165.684,74.346 h1 r90
  text "Incubator front PCB irnas.eu v0.1" at 147.828,73.66 h1.53
Mechanical 1:
  circle w0.013: c141.582,83.271 r1.25
  circle w0.013: c161.582,83.271 r1.25
  circle w0.013: c51.582,83.271 r1.25
  circle w0.013: c71.582,83.271 r1.25
  lines w0.013: 36.582,71.221 ccw(c38.582,71.221) 38.582,69.221 174.582,69.221 ccw(c174.582,71.221) 176.582,71.221 176.582,95.321 ccw(c174.582,95.321) 174.582,97.321 38.582,97.321 ccw(c38.582,95.321) 36.582,95.321 36.582,71.221
ASM TOP:
  text "ASSEMBLY DRAWING TOP" at 96.977,98.628 h1
ASM BOT:
  text "ASSEMBLY DRAWING BOT" at 116.027,98.476 h1

## Dimensions
38.582,97.321 to 38.582,69.221 on Mechanical 1
36.582,95.321 to 176.582,95.321 on Mechanical 1